# Altium PCB qav90_sharp_ref.PcbDoc (part 1 of 3)
Units mm, origin at the board's own origin, x right, y up, seen from the top; angles counter-clockwise.
Board outline 125.43 x 101.14 mm, 3 copper layers (Top Layer, Mid-Layer 1, Bottom Layer); 90 components, 77 nets, 313 pads, 238 vias.
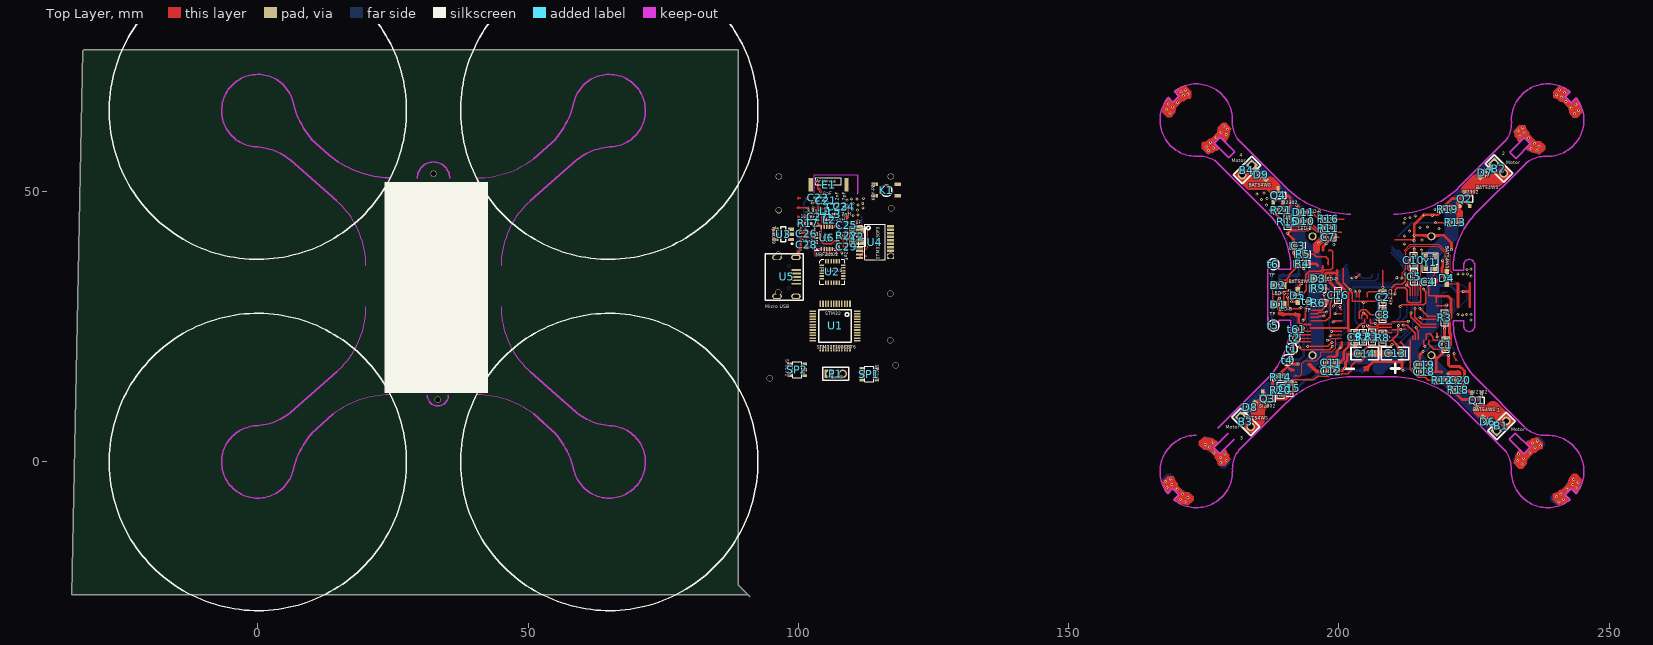
[diagram p0: Top Layer view]
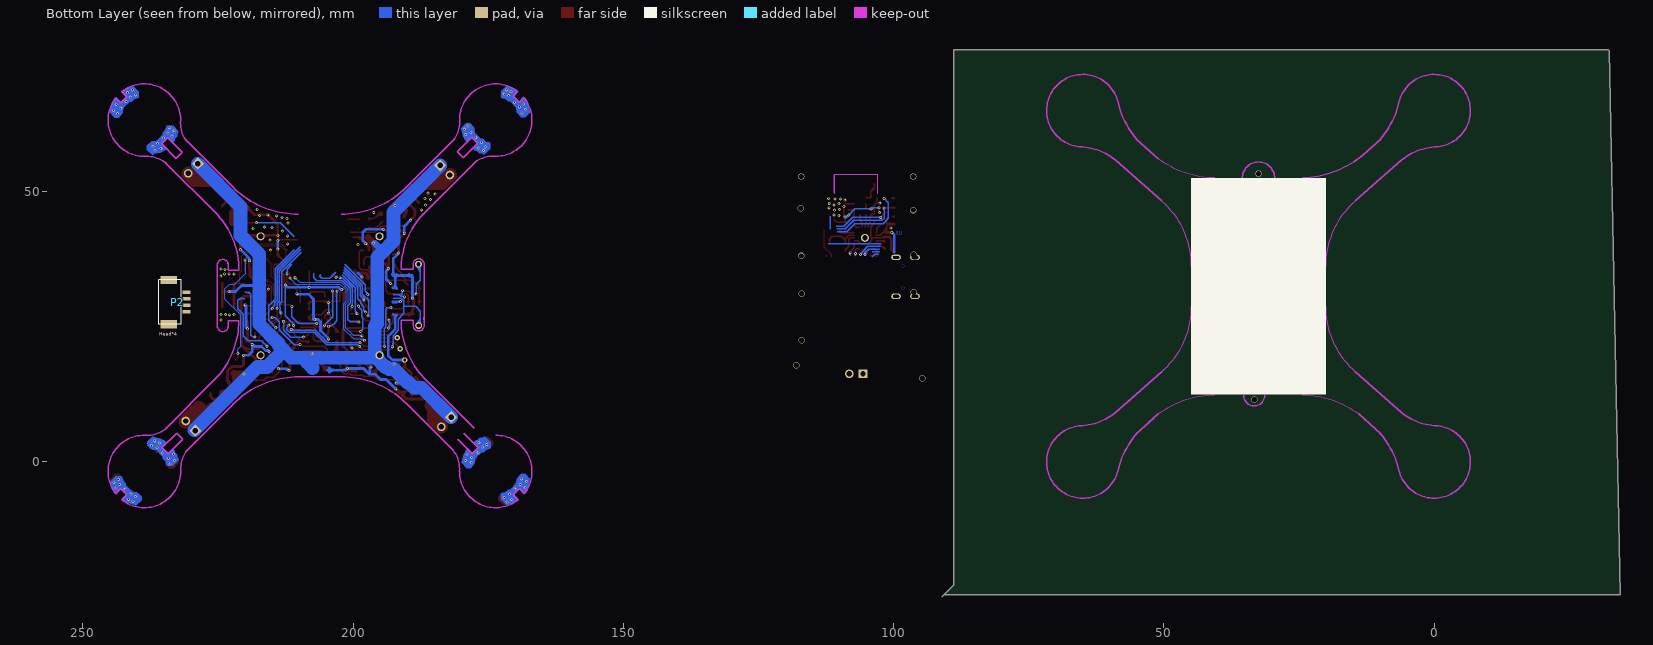
[diagram p1: Bottom Layer view, seen from below]

## Layer stack, top to bottom
Top Solder: solder mask 0.0102, Solder Resist, Dk 3.5
Top Layer: signal copper 0.0356
Dielectric1: dielectric 0.32, FR-4, Dk 4.8
Mid-Layer 1: signal copper 0.0356
Dielectric2: dielectric 0.32, FR-4, Dk 4.8
Bottom Layer: signal copper 0.0356
Bottom Solder: solder mask 0.0102, Solder Resist, Dk 3.5

## Board outline
-32.425,76.043 -32.247,76.221 88.886,76.221 88.886,-22.763 91.045,-24.922 90.689,-24.566 -34.38,-24.566

## Design rules (kind name [scope] priority, off if disabled: settings)
Clearance [All] p1: gap=0.152
ComponentClearance [All] p1: gap=0 collisioncheckmode=3 verticalgap=0 showdistances=FALSE
HoleToHoleClearance [All] p1: gap=0 allowstackedmicrovias=FALSE
MinimumSolderMaskSliver [All] p1: minsoldermaskwidth=0
PlaneConnect [All] p1: planeconnectstyle=Direct reliefexpansion=0.508 reliefentries=4 reliefconductorwidth=0.254 reliefairgap=0.254
PolygonConnect [All] p1: connectstyle=Direct reliefconductorwidth=0.254 reliefentries=4 polygonreliefangle="90 Angle" airgapwidth=0.254
RoutingVias [All] p1: holewidth=0.3 width=0.605 viastyle="Through Hole" minholewidth=0.25 minwidth=0.55 maxholewidth=0.5 maxwidth=1.27
SilkToSilkClearance [All] p1: silktosilkclearance=0
SilkToSolderMaskClearance [IsPad] p1: minsilkscreentomaskgap=0 clearancetoexposedcopper=TRUE
SolderMaskExpansion [All] p1: expansion=0.102
Width [All] p1: maxlimit=2.54 minlimit=0.178 preferedwidth=0.254 midlayer1_minwidth=0.254 midlayer1_maxwidth=0.254 minimp=50.000000 maximp=50.000000 favimp=50.000000
23 further rules are at their usual default settings.

## Classes and differential pairs
component class qav90: C9 t61

## Components (designator, comment, footprint, x,y, rotation, side; value= is the part's Value field where it differs from the comment)
B1 "Motor" HEAD2 230.967,7.586 r135 top
B2 "Motor" HEAD2 230.492,53.386 r45 top
B3 "Motor" HEAD2 183.667,6.511 r45 top
B4 "Motor" HEAD2 182.08,53.092 r315 top
C1 "104" 0603C 219.769,22.519 r270 top
C2 "C2.2nF" 0603C 208.142,31.255 r270 top
C3 "C1uF" 0603C 191.642,40.011 r0 top
C4 "22pF" 0603C 217.305,33.342 r180 top
C5 "22pF" 0603C 213.905,35.069 r270 top
C7 "10uF" 0603C 197.267,41.536 r0 top
C8 "104" 0603C 208.142,28.055 r270 top
C9 "104" 0603C 202.954,22.316 r90 top
C10 "C1uF" 0603C 213.882,36.564 r90 top
C11 "104" 0603C 197.798,18.353 r0 top
C12 "10uF" 0603C 197.798,16.829 r0 top
C13 "22uF" 0805 208.092,18.611 r0 top
C14 "22uF" 0805 207.067,21.536 r180 top
C15 "C1uF" 0603C 190.864,12.816 r90 top
C16 "C1uF" 0603C 199.881,31.637 r270 top
C18 "104" 0603C 215.019,16.702 r0 top
C19 "10uF" 0603C 216.543,18.023 r180 top
C20 "C1uF" 0603C 223.242,15.111 r180 top
C21 "1.5pF" 0402 105.126,47.795 r90 top
C22 "1.0pF" 0402 103.094,48.887 r0 top
C23 "2.2nF" 0402 107.31,47.744 r270 top
C24 "4.7pF" 0402 108.478,47.744 r270 top
C25 "22pF" 0402 108.936,44.366 r270 top
C26 "10nF" 0402 101.595,42.765 r270 top
C27 "100nF" 0402 103.551,45.89 r270 top
C28 "33nF" 0402 101.595,39.667 r90 top
C29 "22pF" 0402 108.936,39.26 r90 top
D1 "LED-B" LED 187.752,29.122 r0 top
D2 "LED-G" LED 187.752,32.652 r0 top
D3 "LED-G" LED 197.214,33.873 r180 top
D4 "BAT54WS" LC-SOD-323F 219.947,34.025 r270 top
D5 "BAT54WS" LC-SOD-323F 192.337,30.723 r270 top
D6 "BAT54WS" LC-SOD-323F 227.517,7.461 r135 top
D7 "BAT54WS" LC-SOD-323F 227.042,53.536 r225 top
D8 "BAT54WS" LC-SOD-323F 183.567,10.086 r45 top
D9 "BAT54WS" LC-SOD-323F 185.592,53.161 r315 top
D10 "LED-B" LED 192.521,44.514 r0 top
D11 "LED-R" LED 192.521,46.165 r0 top
E1 "Antenna" ANT6520 102.3,51.313 r0 top
K1 "KEY-PB" KEY_ALPS 118.4,49.213 r180 top
L1 "3.9nH" 0402 105.126,45.839 r90 top
L2 "8.2nH" 0402 106.218,44.797 r180 top
L3 "2.7nH" 0402 107.31,45.839 r180 top
P1 "Head2" HEAD2 108.2,16.313 r90 top
P2 "Head*4" NIUB-4P 230.8,27.8 r90 bottom
Q1 "SI2302" SOT-23-3 226.392,12.686 r180 top
Q2 "SI2302" SOT-23-3 222.417,47.361 r0 top
Q3 "SI2302" SOT-23-3 187.689,13.045 r180 top
Q4 "SI2302" SOT-23-3 187.841,48.02 r0 top
R1 "R10K" 0603R 206.205,23.967 r270 top
R2 "R10K" 0603R 204.522,23.928 r270 top
R3 "R10K" 0603R 219.616,27.472 r270 top
R4 "R1K" 0603R 192.426,36.673 r0 top
R5 "1.5K" 0603R 192.567,38.411 r0 top
R6 "R220" 0603R 195.41,29.478 r0 top
R8 "R10K" 0603R 208.085,22.163 r90 top
R9 "R2K" 0603R 195.359,32.095 r0 top
R11 "R2K" 0603R 197.267,43.261 r0 top
R12 "100R" 0603R 219.867,15.111 r180 top
R13 "100R" 0603R 222.342,44.311 r180 top
R14 "100R" 0603R 188.451,15.686 r0 top
R15 "100R" 0603R 190.567,45.261 r270 top
R16 "R2K" 0603R 197.267,44.986 r0 top
R17 "22K" 0402 102.357,44.137 r180 top
R18 "R10K" 0603R 221.293,13.4 r0 top
R19 "R10K" 0603R 219.319,46.711 r0 top
R20 "R10K" 0603R 189.238,14.086 r270 top
R21 "R10K" 0603R 188.527,46.598 r0 top
R22 "R1M" 0402 108.936,42.363 r270 top
SP1 "SP6201" SOT23-5 111.7,17.313 r270 top
SP2 "SP6201" SOT23-5 101.2,16.013 r90 top
t1 "TP" TESTPOINT#1 191.295,20.944 r0 top
t2 "TP" TESTPOINT#1 191.829,23.001 r0 top
t3 "TP" TEST_PAD 194.216,29.707 r0 top
t4 "TP" TESTPOINT#1 190.457,18.861 r0 top
t5 "TP" TESTPOINT#2 187.866,25.237 r0 top
t6 "TP" TESTPOINT#2 187.892,36.59 r0 top
t61 "TP" TEST_PAD 192.184,24.576 r0 top
U1 "STM32F103C8T6" STM32C8T6 108.7,24.313 r90 top
U2 "MPU6050" QFN24-1 104.3,36.413 r270 top
U3 "Tp4059" LC-SOT-23-6 97.2,42.113 r0 top
U4 "STM32F030F3" TSSOP20 111.3,43.613 r270 top
U5 "Micro USB" MicroUSB 99.6,35.513 r0 top
U6 "NRF24l01" "QFN20-4x4 - duplicate" 104.262,39.438 r90 top
Y1 "12M" XTAL3225 218.042,35.422 r90 top
Y2 "16M" XTAL3225 112.161,40.2 r90 top

## Footprints (in the part's own frame and the unit in brackets; to place one, negate y for a bottom-side part, rotate by r counter-clockwise, add the part's x,y. Pads: shape width x height; smd on the part's side, far side on the other; paste and mask are expansions set on the pad)
0402 [mm]
  rect 0.5x0.5 smd: 1(0,0) 2(1.1,0)
  silkscreen extent 0.55,-0.23 0.55,0.23
0603C [mil]
  rect 30x30 smd: 1(0,0) 2(62.99,0)
  silkscreen extent -26,-26 89,26
0603R [mil]
  rect 30x30 smd: 1(0,0) 2(62.99,0)
  silkscreen extent -26,-26 89,26
0805 [mil]
  rect 60x50 smd: 1(40.37,58.09) 2(140.37,58.09)
  silkscreen extent -10,13 190,103
ANT6520 [mm]
  rect 0.8x2.5 smd: 1(0,0) 2(6.6,0)
  silkscreen extent 0.92,-0.05 5.6,1.22
HEAD2 [mm]
  rect 1.6x1.6 hole 1: 1(0,2.54)
  round 1.6 hole 1: 2(0,0)
  silkscreen extent -1.18,-1.15 1.18,3.72
KEY_ALPS [mm]
  rect 1.2x0.65 smd: 1(0,0) 1(4.3,0) 2(0,-2.15) 2(4.3,-2.15)
  silkscreen extent 1.09,-1.98 3.15,0.08
LC-SOD-323F [mm]
  rect 1x0.83 smd: 1(1.18,0) 2(-1.18,0)
  silkscreen extent -0.4,-0.6 0.4,0.6, body extent -1.4,-0.67 1.4,0.68, height 0.75
LC-SOT-23-6 [mm]
  rect 1.1x0.6 smd: 1(1.4,-0.95) 2(1.4,0) 3(1.4,0.95) 4(-1.4,0.95) 5(-1.4,0) 6(-1.4,-0.95)
  silkscreen extent -0.5,-1.87 1.73,1.4
LED [mil]
  rect 40x50 smd: 1(0,0) 2(78.74,0)
  silkscreen extent 29,-25 49,27
MicroUSB [mm]
  oval 1.8x1 hole 0.6 slot 1.2 at 0 deg: 0(-3.55,-4.87) 0(-3.55,2.33)
  oval 1.8x1 hole 0.5 slot 1.1 at 0 deg: 0(-0.05,-4.87) 0(-0.05,2.33)
  rect 1.8x0.32 smd: 1(0,0) 2(0,-0.635) 3(0,-1.27) 4(0,-1.905) 5(0,-2.54)
  silkscreen extent -5.75,-5.62 1.3,3.06
NIUB-4P [mm]
  rect 1.5x3 smd: 0(-2.32,3.3) 0(5.895,3.3)
  rect 0.6x1.5 smd: 1(0,0) 2(1.2,0) 3(2.4,0) 4(3.6,0)
  silkscreen extent -2.32,1 5.92,5.12
"QFN20-4x4 - duplicate" [mm]
  rect 0.75x0.3 smd: 1(0,0) 2(0,-0.5) 3(0,-1) 4(0,-1.5) 5(0,-2) 11(4,-2) 12(4,-1.5) 13(4,-1) 14(4,-0.5) 15(4,0)
  rect 0.3x0.75 smd: 6(1,-3) 7(1.5,-3) 8(2,-3) 9(2.5,-3) 10(3,-3) 16(3,1) 17(2.5,1) 18(2,1) 19(1.5,1) 20(1,1)
  silkscreen extent -0.28,-3.27 4.27,1.28
QFN24-1 [mm]
  rect 0.3x0.8 smd: 1(0,0) 2(0.5,0) 3(1,0) 4(1.5,0) 5(2,0) 6(2.5,0) 13(2.5,4) 14(2,4) 15(1.5,4) 16(1,4) 17(0.5,4) 18(0,4)
  rect 0.8x0.3 smd: 7(3.25,0.75) 8(3.25,1.25) 9(3.25,1.75) 10(3.25,2.25) 11(3.25,2.75) 12(3.25,3.25) 19(-0.75,3.25) 20(-0.75,2.75) 21(-0.75,2.25) 22(-0.75,1.75) 23(-0.75,1.25) 24(-0.75,0.75)
  silkscreen extent -1.05,-0.3 3.55,4.3
SOT23-5 [mm]
  rect 0.6x0.8 smd: 1(0,0) 2(1.05,0) 3(2.1,0) 4(2.1,2.8) 5(0,2.8)
  silkscreen extent -0.4,0.6 2.5,2.2
SOT-23-3 [mm]
  rect 0.6x0.8 smd: 1(0,0) 2(1.8,0) 3(0.9,2.6)
  silkscreen extent -0.5,0.7 2.3,1.9
STM32C8T6 [mm]
  rect 1.2x0.3 smd: 1(4.95,-0.85) 2(4.95,-0.35) 3(4.95,0.15) 4(4.95,0.65) 5(4.95,1.15) 6(4.95,1.65) 7(4.95,2.15) 8(4.95,2.65) 9(4.95,3.15) 10(4.95,3.65) 11(4.95,4.15) 12(4.95,4.65) 25(-3.25,4.65) 26(-3.25,4.15) 27(-3.25,3.65) 28(-3.25,3.15) 29(-3.25,2.65) 30(-3.25,2.15) 31(-3.25,1.65) 32(-3.25,1.15) 33(-3.25,0.65) 34(-3.25,0.15) 35(-3.25,-0.35) 36(-3.25,-0.85)
  rect 0.3x1.2 smd: 13(3.6,6) 14(3.1,6) 15(2.6,6) 16(2.1,6) 17(1.6,6) 18(1.1,6) 19(0.6,6) 20(0.1,6) 21(-0.4,6) 22(-0.9,6) 23(-1.4,6) 24(-1.9,6) 37(-1.9,-2.2) 38(-1.4,-2.2) 39(-0.9,-2.2) 40(-0.4,-2.2) 41(0.1,-2.2) 42(0.6,-2.2) 43(1.1,-2.2) 44(1.6,-2.2) 45(2.1,-2.2) 46(2.6,-2.2) 47(3.1,-2.2) 48(3.6,-2.2)
  silkscreen extent -2.16,-1.1 3.86,4.92
TEST_PAD [mm]
  round 1 smd: 1(0,0)
TESTPOINT#1 [mm]
  round 1 hole 0.5: 1(0,0)
  silkscreen extent -1.01,-1.02 1.02,1.02
TESTPOINT#2 [mm]
  round 1.27 hole 0.8: 1(0,0)
  silkscreen extent -1.01,-1.02 1.02,1.02
TSSOP20 [mm]
  rect 0.4x1.35 smd: 1(0,0) 2(0.65,0) 3(1.3,0) 4(1.95,0) 5(2.6,0) 6(3.25,0) 7(3.9,0) 8(4.55,0) 9(5.2,0) 10(5.85,0) 11(5.85,5.75) 12(5.2,5.75) 13(4.55,5.75) 14(3.9,5.75) 15(3.25,5.75) 16(2.6,5.75) 17(1.95,5.75) 18(1.3,5.75) 19(0.65,5.75) 20(0,5.75)
  silkscreen extent -0.33,1 6.17,4.75
XTAL3225 [mm]
  rect 1x0.8 smd: 1(0.4,0.3) 2(2.6,0.3) 3(2.6,2) 4(0.4,2)
  silkscreen extent -0.3,-0.3 3.3,2.6

## Part data
B1 B2 B3 B4: "Motor, General Kind"
C1 C2 C3 C4 C5 C8 C9 C10 C11 C15 C16 C18 C20 C21 C22 C23 C24 C25 C26 C27 C28 C29: library part C0.1uF
C7 C12 C19: library part C10uF
C13 C14: library part C100uF
D1 D2 D3 D10 D11: library part LED
D4 D5 D6 D7 D8 D9: library part Diode
E1: "Generic Antenna"
L1 L2 L3: library part Inductor-100uH
Q1 Q2 Q3 Q4: library part MOSFET-N
R5 R9 R11 R16: library part R1K
R6 R17 R22: library part R10K
R12 R13 R14 R15: library part R100R
U4: library part STM32F030F4
U5: library part "MINI USB"
Y1 Y2: library part CRYSTAL, "Crystal"

## Free pads (board coordinates)
  round 1.5 hole 1: 1(105.303,41.47) 10(195.108,19.748) 11(217.108,19.748) 12(195.108,41.748) 13(217.108,41.748)

## Via types
v1: diameter 0.55, hole 0.25, Top Layer to Bottom Layer, tented both sides, 216 vias
v2: diameter 1.2, hole 1, Top Layer to Bottom Layer, 13 vias
v3: diameter 0.55, hole 0.25, Top Layer to Bottom Layer, 6 vias
v4: diameter 0.6, hole 0.6, Top Layer to Bottom Layer, tented both sides, 2 vias
v5: diameter 0.605, hole 0.3, Top Layer to Bottom Layer, tented both sides, 1 vias

## Nets (pads, with @x,y where several pads share a name; then routed paths per layer and width w, separated by ;. In a path a pad name is that pad's centre, name@x,y a point inside that pad or via, vN(x,y) a via of type N, cw(c..) or ccw(c..) an arc to the next point about the centre after c; other vN are vias at no path point)
2V8: 
4V3: 
AD-BAT: 
CE: 
CSN: 
DSM2: 
EN: 
FCS: 
GND: 
HMC-INT: 
IRQ: 
JTCK: 
JTMS: 
KEY2: 
LED6: 
LED7: 
MPU-INT: 
NetB1_2: 
NetB2_2: 
NetB3_2: 
NetB4_2: 
NetC2_1: 
NetC4_2: 
NetC5_2: 
NetC9_2: 
NetC16_2: 
NetC21_1: 
NetC21_2: 
NetC23_2: 
NetC28_2: 
NetD1_1: 
NetD1_2: 
NetD2_2: 
NetD3_2: 
NetD5_1: 
NetD10_2: 
NetD11_2: 
NetL1_1: 
NetL2_1: 
NetQ1_1: 
NetQ2_1: 
NetQ3_1: 
NetQ4_1: 
NetR3_1: 
NetR5_2: 
NetR6_2: 
NetR8_2: 
NetR17_1: 
Nett61_1: 
PWM1: 
PWM2: 
PWM3: 
PWM4: 
R_CE: 
R_CS: 
R_I: 
R_INT: 
R_K: 
R_O: 
RFVCC: 
RST: 
RX: 
SCL: 
SCLK: 
SDA: 
SDI: 
SDO: 
SPI_MISO: 
SPI_MOSI: 
SPI_SCK: 
STM8-LED: 
SWCK: 
SWIO: 
TX: 
VBUS: 
XC1: 
XC2: 
pads on no net: B1.1 B1.2 B2.1 B2.2 B3.1 B3.2 B4.1 B4.2 C1.1 C1.2 C2.1 C2.2 C3.1 C3.2 C4.1 C4.2 C5.1 C5.2 C7.1 C7.2 C8.1 C8.2 C9.1 C9.2 C10.1 C10.2 C11.1 C11.2 C12.1 C12.2 C13.1 C13.2 C14.1 C14.2 C15.1 C15.2 C16.1 C16.2 C18.1 C18.2 C19.1 C19.2 C20.1 C20.2 C21.1 C21.2 C22.1 C22.2 C23.1 C23.2 C24.1 C24.2 C25.1 C25.2 C26.1 C26.2 C27.1 C27.2 C28.1 C28.2 C29.1 C29.2 D1.1 D1.2 D2.1 D2.2 D3.1 D3.2 D4.1 D4.2 D5.1 D5.2 D6.1 D6.2 D7.1 D7.2 D8.1 D8.2 D9.1 D9.2 D10.1 D10.2 D11.1 D11.2 E1.1 E1.2 K1.1 K1.2 L1.1 L1.2 L2.1 L2.2 L3.1 L3.2 P1.1 P1.2 P2.0 P2.1 P2.2 P2.3 P2.4 Q1.1 Q1.2 Q1.3 Q2.1 Q2.2 Q2.3 Q3.1 Q3.2 Q3.3 Q4.1 Q4.2 Q4.3 R1.1 R1.2 R2.1 R2.2 R3.1 R3.2 R4.1 R4.2 R5.1 R5.2 R6.1 R6.2 R8.1 R8.2 R9.1 R9.2 R11.1 R11.2 R12.1 R12.2 R13.1 R13.2 R14.1 R14.2 R15.1 R15.2 R16.1 R16.2 R17.1 R17.2 R18.1 R18.2 R19.1 R19.2 R20.1 R20.2 R21.1 R21.2 R22.1 R22.2 SP1.1 SP1.2 SP1.3 SP1.4 SP1.5 SP2.1 SP2.2 SP2.3 SP2.4 SP2.5 t1.1 t2.1 t3.1 t4.1 t5.1 t6.1 t61.1 U1.1 U1.2 U1.3 U1.4 U1.5 U1.6 U1.7 U1.8 U1.9 U1.10 U1.11 U1.12 U1.13 U1.14 U1.15 U1.16 U1.17 U1.18 U1.19 U1.20 U1.21 U1.22 U1.23 U1.24 U1.25 U1.26 U1.27 U1.28 U1.29 U1.30 U1.31 U1.32 U1.33 U1.34 U1.35 U1.36 U1.37 U1.38 U1.39 U1.40 U1.41 U1.42 U1.43 U1.44 U1.45 U1.46 U1.47 U1.48 U2.1 U2.2 U2.3 U2.4 U2.5 U2.6 U2.7 U2.8 U2.9 U2.10 U2.11 U2.12 U2.13 U2.14 U2.15 U2.16 U2.17 U2.18 U2.19 U2.20 U2.21 U2.22 U2.23 U2.24 U3.1 U3.2 U3.3 U3.4 U3.5 U3.6 U4.1 U4.2 U4.3 U4.4 U4.5 U4.6 U4.7 U4.8 U4.9 U4.10 U4.11 U4.12 U4.13 U4.14 U4.15 U4.16 U4.17 U4.18 U4.19 U4.20 U5.0 U5.1 U5.2 U5.3 U5.4 U5.5 U6.1 U6.2 U6.3 U6.4 U6.5 U6.6 U6.7 U6.8 U6.9 U6.10 U6.11 U6.12 U6.13 U6.14 U6.15 U6.16 U6.17 U6.18 U6.19 U6.20 Y1.1 Y1.2 Y1.3 Y1.4 Y2.1 Y2.2 Y2.3 Y2.4